# Altium PCB servoUSBrev0.pcbdoc
Units mil, origin at the board's own origin, x right, y up, seen from the top; angles counter-clockwise.
Board outline 2000.03 x 910.03 mil, 2 copper layers (Top Layer, Bottom Layer); 16 components, 23 nets, 87 pads, 11 vias.
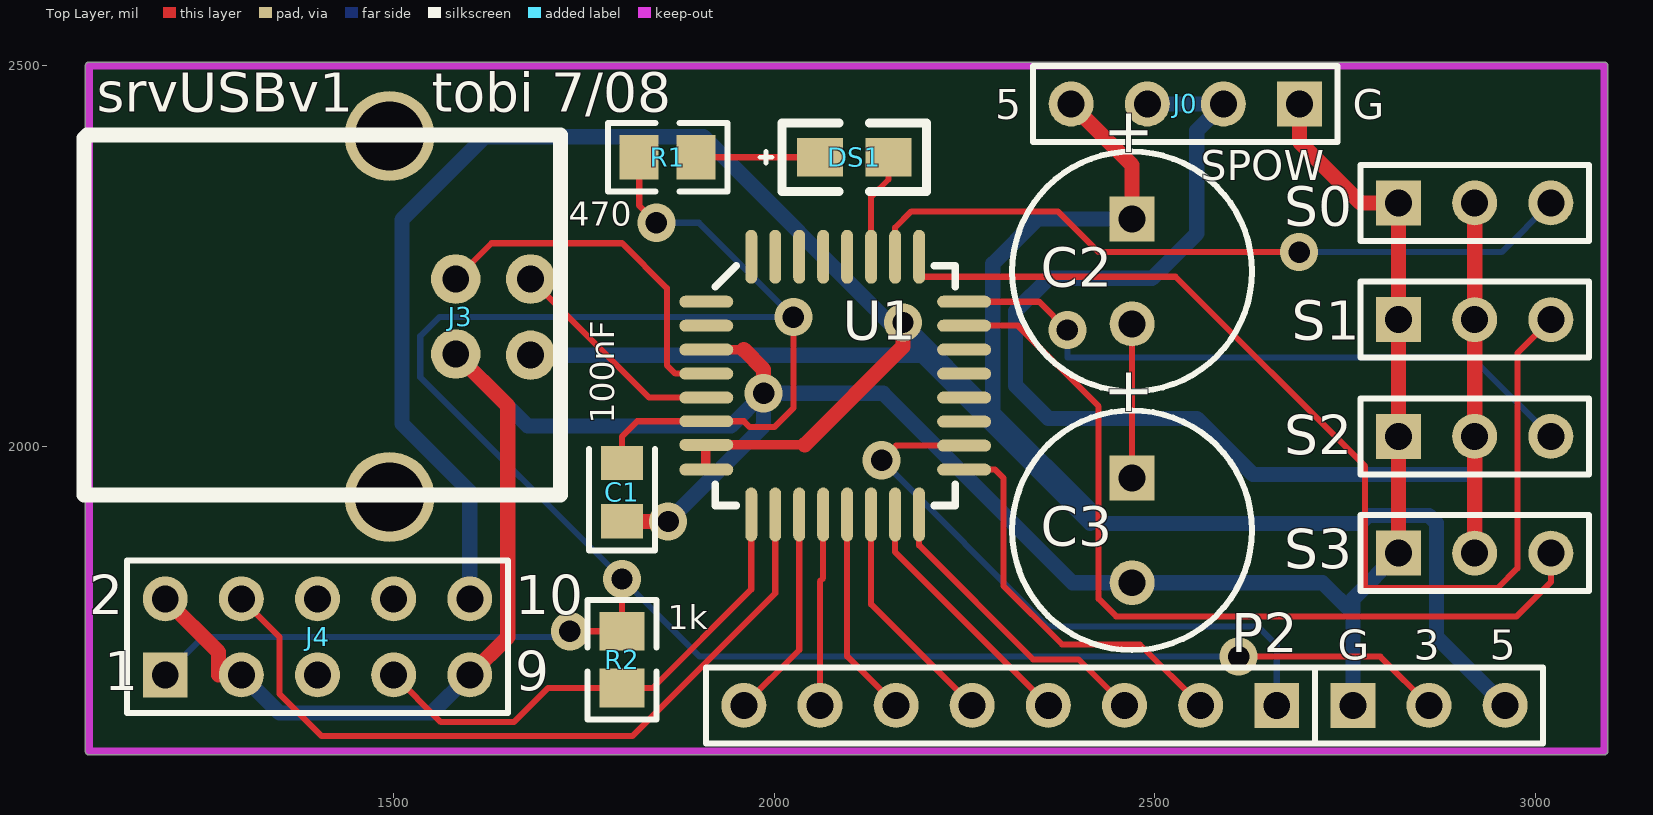
[diagram p0: Top Layer view]
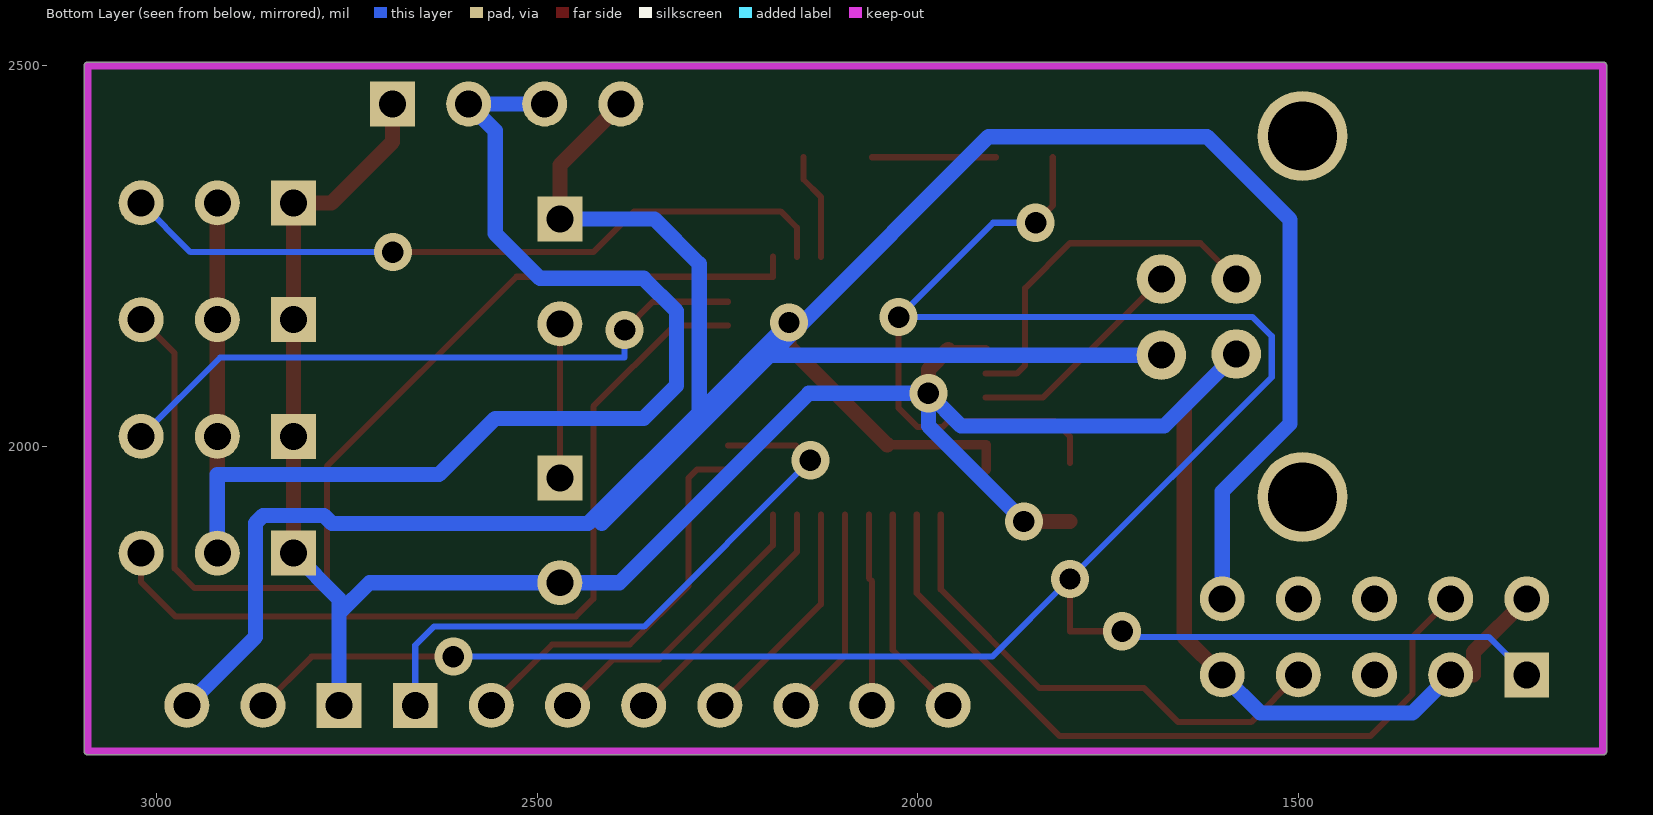
[diagram p1: Bottom Layer view, seen from below]

## Layer stack, top to bottom
Top Layer: signal copper 1.4
Dielectric: dielectric 12.6, FR-4, Dk 4.8
Bottom Layer: signal copper 1.4

## Board outline
1100,1594.98 cw(c1100,1600) 1094.98,1600 1094.98,2500 cw(c1100,2500) 1100,2505.01 3090,2505.01 cw(c3090,2500) 3095.01,2500 3095.01,1600 cw(c3090,1600) 3090,1594.98

## Design rules (kind name [scope] priority, off if disabled: settings)
Clearance [All] p1: gap=10
ComponentClearance [All] p1: gap=10 collisioncheckmode=0
PolygonConnect [All] p1: connectstyle=Relief reliefconductorwidth=10 reliefentries=4 polygonreliefangle="90 Angle"
RoomDefinition servoUSBrev0 [InComponentClass('servoUSBrev0')] p1: confinementstyle=ConfineIn formatcopy=TRUE outline 1060,1580 3130,1580 3130,2550 1040,2550 1040,2540
RoutingVias [All] p1: holewidth=28 width=50 viastyle="Through Hole" minholewidth=28 minwidth=50 maxholewidth=28 maxwidth=50
SMDNeckDown [All] p1: percent=80.000
SolderMaskExpansion [All] p1: expansion=4
TestPointUsage [All] p1: valid=0 allowmultiple=FALSE
Testpoint [All] p1: side=15 testpointundercomponent=TRUE minsize=40 maxsize=100 preferedsize=60 minholesize=0 maxholesize=40 preferedholesize=32 testpointgrid=1 style=1023 order=1234567890
Width "Schematic Width Constraint" [InNet('VBUS')] p1: maxlimit=60 minlimit=10 preferedwidth=20
Width "Schematic Width Constraint_2" [InNet('SPOW')] p2: maxlimit=60 minlimit=10 preferedwidth=20
Width "Schematic Width Constraint_1" [InNet('GND')] p3: maxlimit=60 minlimit=10 preferedwidth=20
Width [All] p4: maxlimit=10 minlimit=8 preferedwidth=10 toplayer_maxwidth=8 toplayer_prefwidth=8 bottomlayer_maxwidth=8 bottomlayer_prefwidth=8 minimp=50.000000 maximp=50.000000 favimp=50.000000
17 further rules are at their usual default settings.

## Components (designator, comment, footprint, x,y, rotation, side; value= is the part's Value field where it differs from the comment)
C1 "100nF" CC2013-0805 1800,1940 r90 top
C2 "B0810-2R5105 Aerogel PowerStor (solarbotics.com)" CAPPR3.5-8X10.5 2470,2230 r270 top
C3 "B0810-2R5105 Aerogel PowerStor (solarbotics.com)" CAPPR3.5-8X10.5 2470,1890 r270 top
DS1 "LED" 0805LED 2060,2380 r0 top
J0 "Bat/VBUS" HDR1X4 2690,2450 r180 top
J3 "USB B" usb 1680,2220 r270 top
J4 "Debug" HDR2X5 1200,1700 r0 top
P2 "Port2" HDR1X8 2660,1660 r180 top (schematic designator J5)
POW "POW" HDR1X3 2760,1660 r0 top
R1 "470" CR2012-0805 1860,2380 r0 top
R2 "1k" CR2012-0805 1800,1720 r270 top
S0 "S0" HDR1X3 2820,2320 r0 top
S1 "S1" HDR1X3 2820,2166.67 r0 top
S2 "S2" HDR1X3 2820,2013.33 r0 top
S3 "S3" HDR1X3 2820,1860 r0 top
U1 "C8051F320" TQFP32 2080,2080 r0 top

## Footprints (in the part's own frame and the unit in brackets; to place one, negate y for a bottom-side part, rotate by r counter-clockwise, add the part's x,y. Pads: shape width x height; smd on the part's side, far side on the other; paste and mask are expansions set on the pad)
0805LED [mil]
  rect 60x50 smd: +(0,0) -(90,0)
  silkscreen extent -79,-45 140,45
CAPPR3.5-8X10.5 [mm]
  rect 1.5x1.5 hole 0.9: 1(-1.75,0)
  round 1.5 hole 0.9: 2(1.75,0)
  silkscreen extent -4,-4 4,4
CC2013-0805 [mm]
  rect 1.15x1.4 smd: 1(-0.975,0) 2(0.975,0)
  silkscreen extent -1.95,-1.1 1.45,1.1
CR2012-0805 [mm]
  rect 1.3x1.5 smd: 1(-0.95,0) 2(0.95,0)
  silkscreen extent -2,-1.15 2,1.15
HDR1X3 [mm] "Connector; Header; 3 Position"
  rect 1.5x1.5 hole 0.9: 1(0,0)
  round 1.5 hole 0.9: 2(2.54,0) 3(5.08,0)
  silkscreen extent -1.27,-1.27 6.35,1.27
HDR1X4 [mm] "Connector; Header; 4 Position"
  rect 1.5x1.5 hole 0.9: 1(0,0)
  round 1.5 hole 0.9: 2(2.54,0) 3(5.08,0) 4(7.62,0)
  silkscreen extent -1.27,-1.27 8.89,1.27
HDR1X8 [mm] "Connector; Header; 8 Position"
  rect 1.5x1.5 hole 0.9: 1(0,0)
  round 1.5 hole 0.9: 2(2.54,0) 3(5.08,0) 4(7.62,0) 5(10.16,0) 6(12.7,0) 7(15.24,0) 8(17.78,0)
  silkscreen extent -1.27,-1.27 19.05,1.27
HDR2X5 [mm] "Connector; Header; 5x2 Position"
  rect 1.5x1.5 hole 0.9: 1(0,0)
  round 1.5 hole 0.9: 2(0,2.54) 3(2.54,0) 4(2.54,2.54) 5(5.08,0) 6(5.08,2.54) 7(7.62,0) 8(7.62,2.54) 9(10.16,0) 10(10.16,2.54)
  silkscreen extent -1.27,-1.27 11.43,3.81
TQFP32 [mm]
  oval 1.8x0.4 smd: 1(-4.3,2.8) 2(-4.3,2) 3(-4.3,1.2) 4(-4.3,0.4) 5(-4.3,-0.4) 6(-4.3,-1.188) 7(-4.3,-1.975) 8(-4.3,-2.8) 17(4.3,-2.8) 18(4.3,-2) 19(4.3,-1.2) 20(4.3,-0.4) 21(4.3,0.4) 22(4.3,1.2) 23(4.3,2) 24(4.3,2.8)
  oval 0.4x1.8 smd: 9(-2.8,-4.3) 10(-2,-4.3) 11(-1.2,-4.3) 12(-0.4,-4.3) 13(0.4,-4.3) 14(1.2,-4.3) 15(2,-4.3) 16(2.8,-4.3) 25(2.8,4.3) 26(2,4.3) 27(1.2,4.3) 28(0.4,4.3) 29(-0.4,4.3) 30(-1.2,4.3) 31(-2,4.3) 32(-2.8,4.3)
  silkscreen extent -4,-4 4,4
usb [mm]
  round 1.651 hole 0.9: 1(2.54,0) 2(0,0) 3(0,-2.5) 4(2.5,-2.5)
  round 3 hole 2.3: 5(-4.77,-4.71) 5(7.27,-4.71)
  silkscreen extent -4.8,-14.9 7.2,1

## Part data
C1: library part CAPCHIP
C2 C3: library part "Cap Pol1", "Polarized Capacitor (Radial)"
DS1: "LED, SMT 3mm by 1.5mm"
J0: library part "Header 4", "Header, 4-Pin"
J3: library part USB, "USB TypB"
J4: library part "Header 5X2", "Header, 5-Pin, Dual row"
P2: library part "Header 8", "Header, 8-Pin"
POW S0 S1 S2 S3: library part "Header 3", "Header, 3-Pin"
R1 R2: library part RES1
U1: "Silicon Labs USB Microcontroller"

## Via types
v1: diameter 50, hole 28, Top Layer to Bottom Layer, 11 vias

## Nets (pads, with @x,y where several pads share a name; then routed paths per layer and width w, separated by ;. In a path a pad name is that pad's centre, name@x,y a point inside that pad or via, vN(x,y) a via of type N, cw(c..) or ccw(c..) an arc to the next point about the centre after c; other vN are vias at no path point)
/RST/C2CK: J4.7 R2.2 U1.9 | length 666
  Top Layer w8: J4.7 1562,1638 1658,1638 1702.6,1682.6 R2.2 1840,1682.6 1969.76,1812.36 U1.9
C2D: J4.4 U1.10 | length 1000.8
  Top Layer w8: J4.4 1350,1750 1350,1675 1405,1620 1814,1620 2001.26,1807.26 U1.10
D+: J3.3 U1.4 | length 478.9
  Top Layer w8: J3.3 1628.57,2267 1800,2267 1859,2208 1859,2106.75 1870,2095.75 U1.4
D-: J3.2 U1.5 | length 295.2
  Top Layer w8: J3.2 1835.75,2064.25 U1.5
GND: C1.1 C3.2 J0.1 J3.4 J4.2 J4.3 J4.9 POW.1 S0.1 S1.1 S2.1 S3.1 U1.3 | length 3622.4
  Top Layer w12.6: U1.3 1960,2127.24
  Top Layer w20: J4.2 1270,1730 1270,1700 J4.3 ; J3.4 1650,2053.15 1650,1750 J4.9 ; C1.1 v1(1860.61,1901.61) ; 1960,2127.24 1986,2101.24 v1(1986,2070) ; J0.1 2690,2400 2770,2320 S0.1 S1.1 S2.1 S3.1
  Bottom Layer w20: J4.3 1350,1650 1550,1650 J4.9 ; J3.4 1676.15,2027 1943,2027 v1(1986,2070) ; v1(1860.61,1901.61) 1986,2027 v1(1986,2070) ; POW.1 2760,1781.1 ; S3.1 2760,1800 2760,1781.1 ; v1(1986,2070) 2143,2070 2391.9,1821.1 C3.2 2720,1821.1 2760,1781.1
LED+: DS1.+ R1.2 | length 162.6
  Top Layer w8: R1.2 DS1.+
LED-: DS1.- U1.27 | length 140.1
  Top Layer w8: U1.27 2127.24,2328 2150,2350.76 DS1.-
NetC2_2: C2.2 C3.1 | length 202.2
  Top Layer w8: C3.1 C2.2
P20: P2.1 U1.18 | length 814.9
  Top Layer w8: v1(2141,1982) 2160.26,2001.26 U1.18
  Bottom Layer w8: v1(2141,1982) 2359.47,1763.53 2635.47,1763.53 2660,1739 P2.1
P21: P2.2 U1.17 | length 522.1
  Top Layer w8: U1.17 2290,1969.76 2301,1958.76 2301,1817 2378,1740 2480,1740 P2.2
P22: P2.3 U1.16 | length 397.4
  Top Layer w8: U1.16 2190.24,1870.06 2340,1720.3 2399.7,1720.3 P2.3
P23: P2.4 U1.15 | length 334.1
  Top Layer w8: U1.15 2158.74,1861.26 P2.4
P24: P2.5 U1.14 | length 305.7
  Top Layer w8: U1.14 2127.24,1792.76 P2.5
P25: P2.6 U1.13 | length 277.3
  Top Layer w8: U1.13 2095.75,1724.25 P2.6
P26: P2.7 U1.12 | length 252.5
  Top Layer w8: P2.7 2060,1823 2064.25,1827.25 U1.12
P27: P2.8 U1.11 | length 280.8
  Top Layer w8: P2.8 2032.76,1732.76 U1.11
S0: S0.3 U1.26 | length 957.5
  Top Layer w8: U1.26 2158.74,2287.74 2180,2309 2372.37,2309 2426,2255.37 v1(2689.37,2255.37)
  Bottom Layer w8: v1(2689.37,2255.37) 2955.37,2255.37 S0.3
S1: S1.3 U1.25 | length 1430.9
  Top Layer w8: U1.25 2190.24,2223 2527,2223 2776,1974 2776,1814 2950,1814 2976,1840 2976,2122.67 S1.3
S2: S2.3 U1.24 | length 865.1
  Top Layer w8: U1.24 2347.76,2190.24 v1(2385,2153)
  Bottom Layer w8: v1(2385,2153) 2385,2117 2916.33,2117 S2.3
S3: S3.3 U1.23 | length 1133.5
  Top Layer w8: U1.23 2320,2158.74 2426,2052.74 2426,1800 2449,1777 2975,1777 3020,1822 S3.3
SPOW: J0.2 J0.3 S0.2 S1.2 S2.2 S3.2 | length 1877.4
  Top Layer w20: S3.2 S2.2 S1.2 S0.2
  Bottom Layer w20: J0.3 J0.2 2555,2415 2555,2280 2496,2221 2360,2221 2317,2178 2317,2080 2360,2037 2555,2037 2628.67,1963.33 2920,1963.33 S3.2
VBUS: C2.1 J0.4 J3.1 J4.10 POW.3 U1.7 U1.8 | length 4280.8
  Top Layer w12.6: U1.8 1910,1969.76 1910,2002.24 U1.7 2040,2002.24
  Top Layer w20: 2040,2002.24 2169,2131.24 v1(2169,2163) ; J0.4 2470,2370 C2.1
  Bottom Layer w20: J4.10 1600,1941 1511,2030 1511,2298 1620,2407 1907,2407 2160,2154 2194,2120 ; J3.1 2194,2120 ; v1(2169,2163) 2287,2045 ; C2.1 2345.9,2298.9 2287,2240 2287,2045 ; POW.3 2870,1750 2870,1899.53 2860,1909.53 2780,1909.53 2769.47,1899 2433,1899 2424,1908 ; 2194,2120 2415,1899 2424,1908 ; 2287,2045 2424,1908
VDD: C1.2 J4.1 POW.2 R1.1 R2.1 U1.6 | length 3478.1
  Top Layer w8: v1(1731.4,1757.4) R2.1 v1(1800,1826) ; C1.2 1800,2013.24 1820,2033.24 U1.6 1960,2033.24 1967.74,2025.5 2000,2025.5 2025,2050.5 v1(2025,2170) ; R1.1 1822.6,2316.4 v1(1845,2294) ; v1(2610,1724) 2796,1724 POW.2
  Bottom Layer w8: J4.1 1250,1750 1724,1750 v1(1731.4,1757.4) ; v1(1845,2294) 1901,2294 v1(2025,2170) 1560,2170 1535,2145 1535,2091 v1(1800,1826) 1902,1724 v1(2610,1724)
pads on no net: J3.5 J4.5 J4.6 J4.8 U1.1 U1.2 U1.19 U1.20 U1.21 U1.22 U1.28 U1.29 U1.30 U1.31 U1.32

## Keep-outs
Keep-Out Layer:
  lines w10: 1100,1600 3090,1600 3090,2500 1100,2500 1100,1600

## Silkscreen, mask and mechanical layers (free items; w line width, h text height)
Top Overlay:
  text "srvUSBv1" at 1110,2440 h51.18
  text "tobi 7/08" at 1550,2440 h51.18
  text "5" at 2290,2430 h39.37
  text "G" at 2760,2430 h39.37
  text "SPOW" at 2560,2350 h39.37
  text "G" at 2740,1720 h39.37
  text "3" at 2840,1720 h39.37
  text "5" at 2940,1720 h39.37
Drill Drawing:
  text ".LEGEND" at 3020,1070 h51.18
  text "Drill Drawing." at 3050,810 h51.18

## Dimensions
1100,1600 to 3090,1600 on Mechanical 1
1100,1600 to 1100,2500 on Mechanical 1

## Text inside footprints (layer, text, board x,y; h text height)
C2: Top Overlay "+" at 2440.47,2445.55 h59.06 r270
C3: Top Overlay "+" at 2440.47,2105.55 h59.06 r270
J4: Top Overlay "2" at 1100,1780 h51.18; Top Overlay "1" at 1120,1680 h51.18; Top Overlay "9" at 1660,1680 h51.18; Top Overlay "10" at 1660,1780 h51.18